# Altium PCB PCB.PcbDoc
Units mil, origin at the board's own origin, x right, y up, seen from the top; angles counter-clockwise.
Board outline 6000 x 4000 mil, 6 copper layers (Top Layer, Int1 (GND), Int2 (Sign), Int3 (Sign), Int4 (PWR), Bottom Layer), stack 61.068 mil thick; 37 components, 46 nets, 228 pads, 17 vias.
Unrouted connection lines stored in the file: 93.
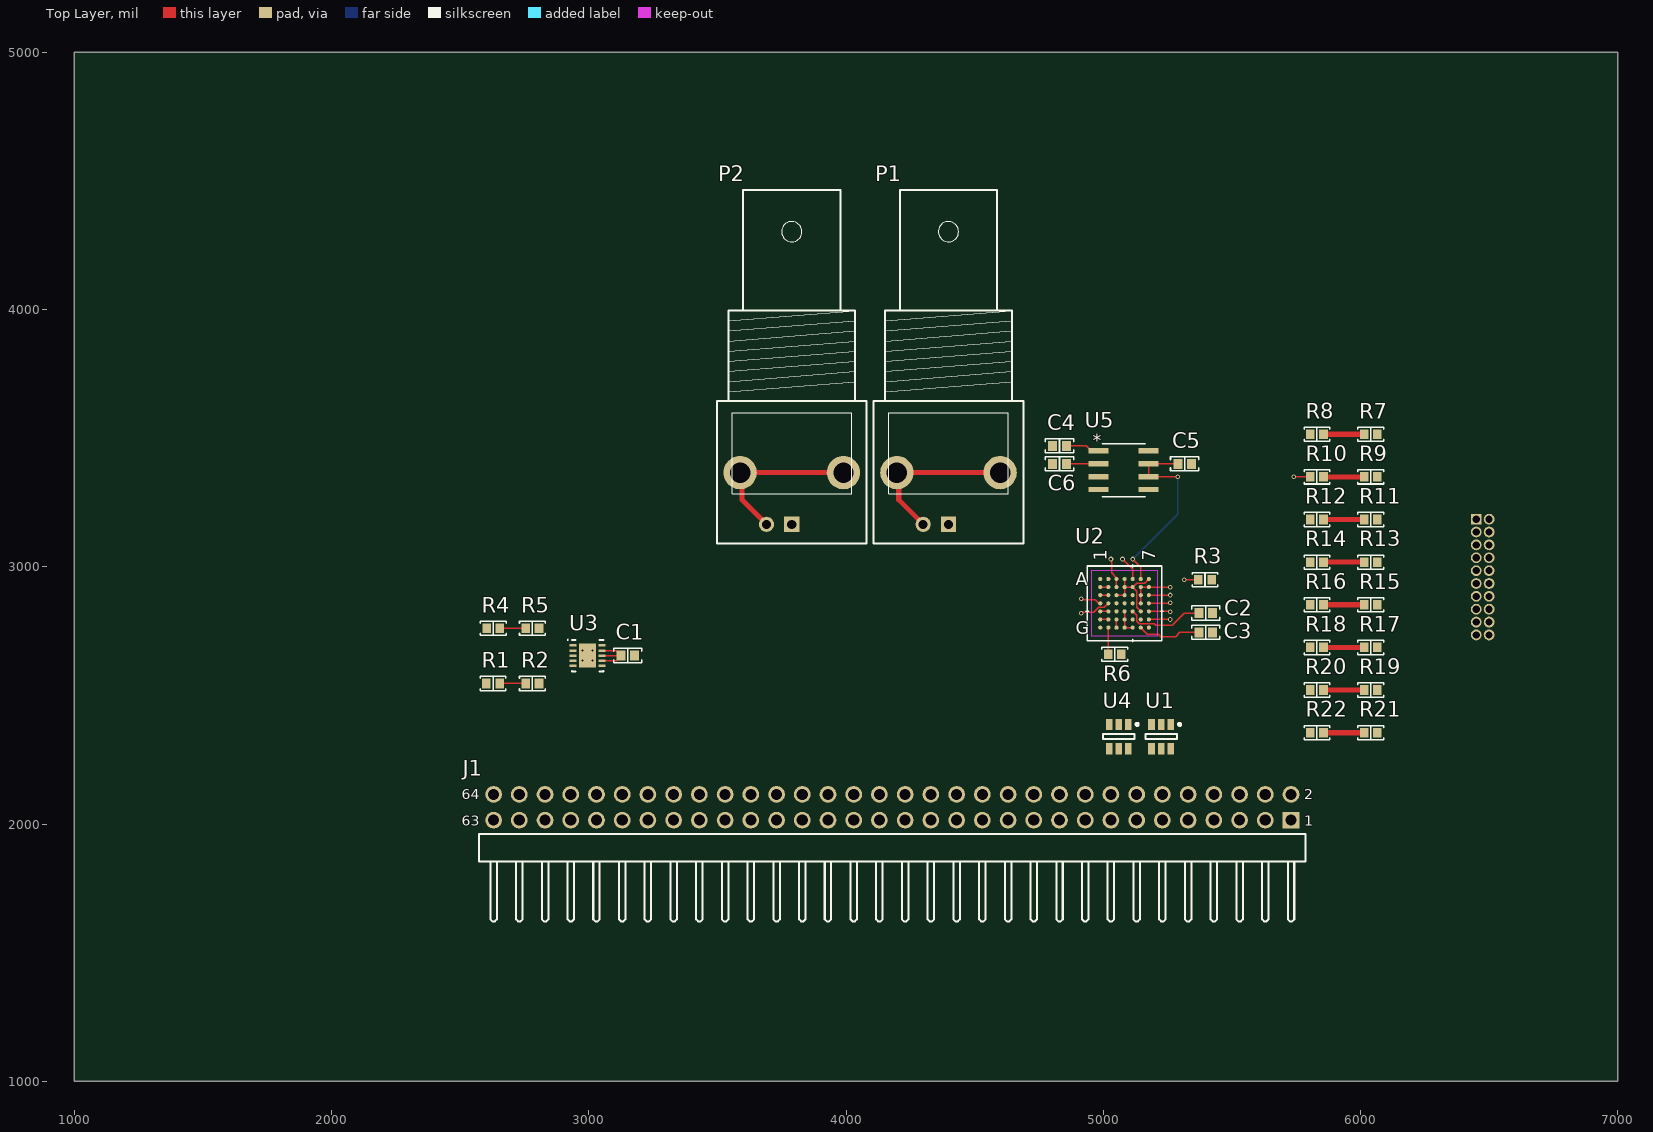
[diagram p0: Top Layer view]
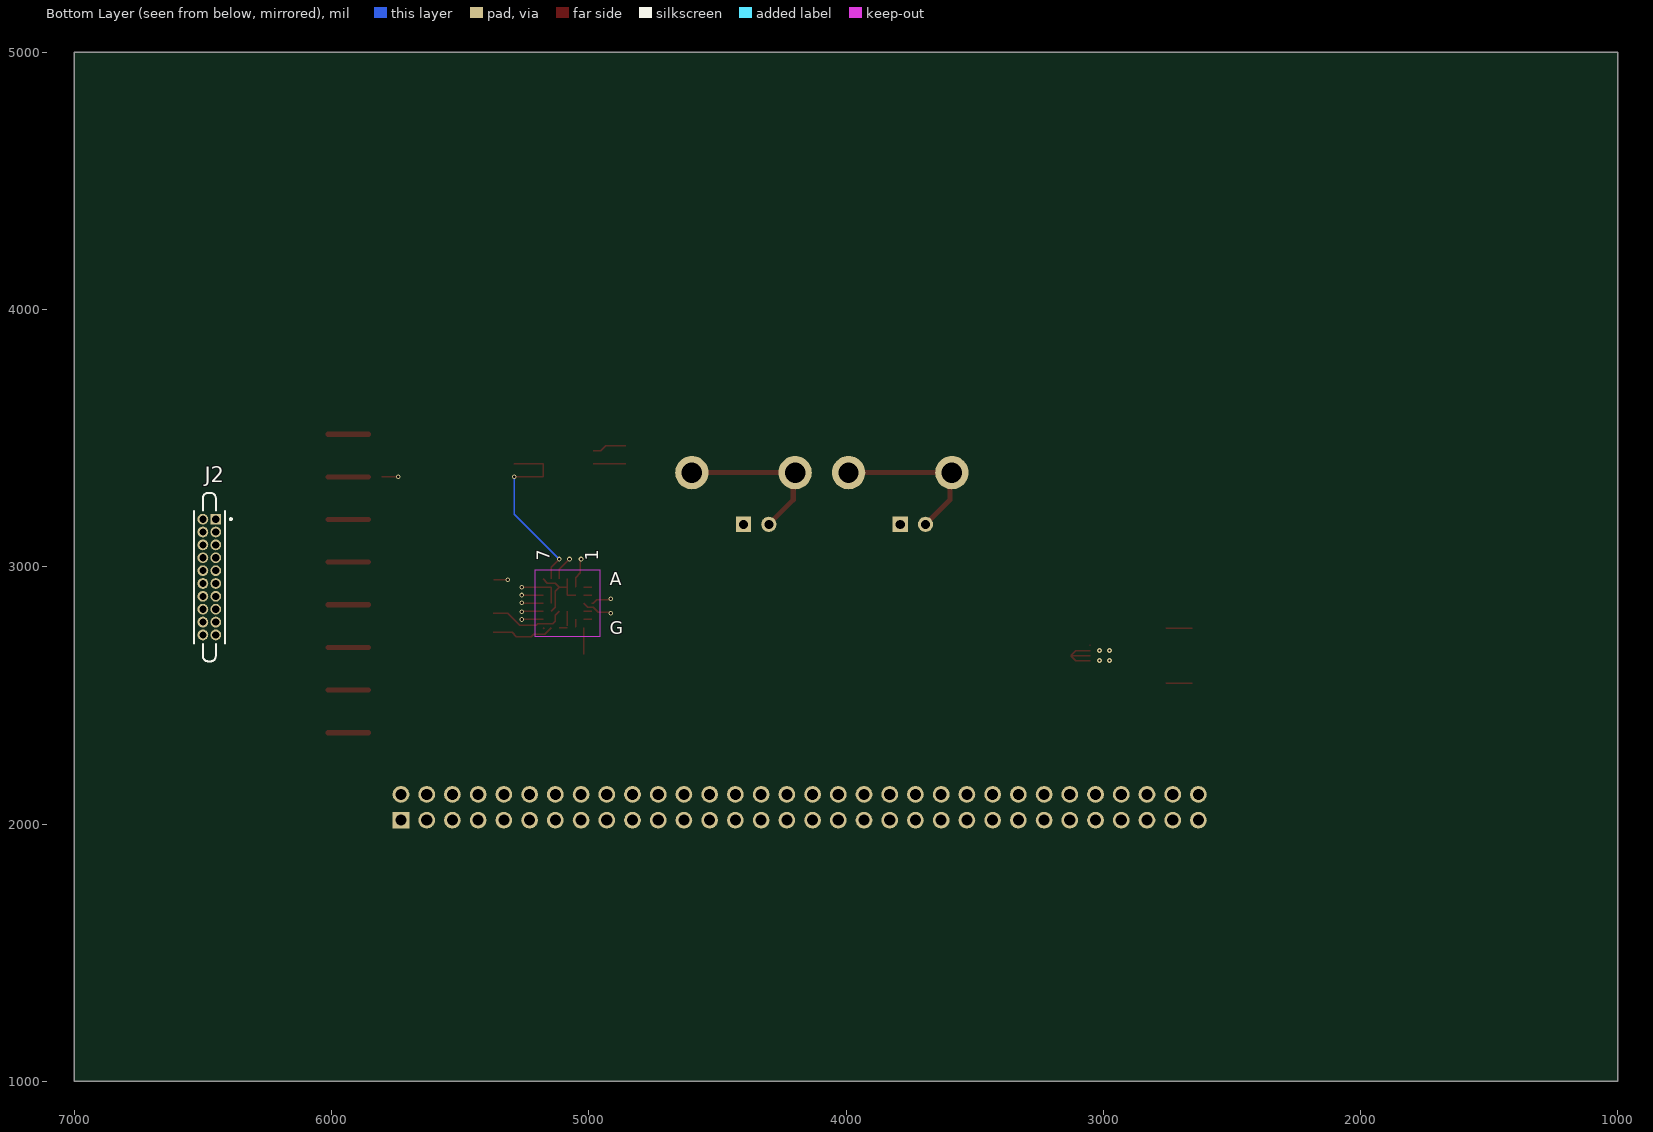
[diagram p1: Bottom Layer view, seen from below]
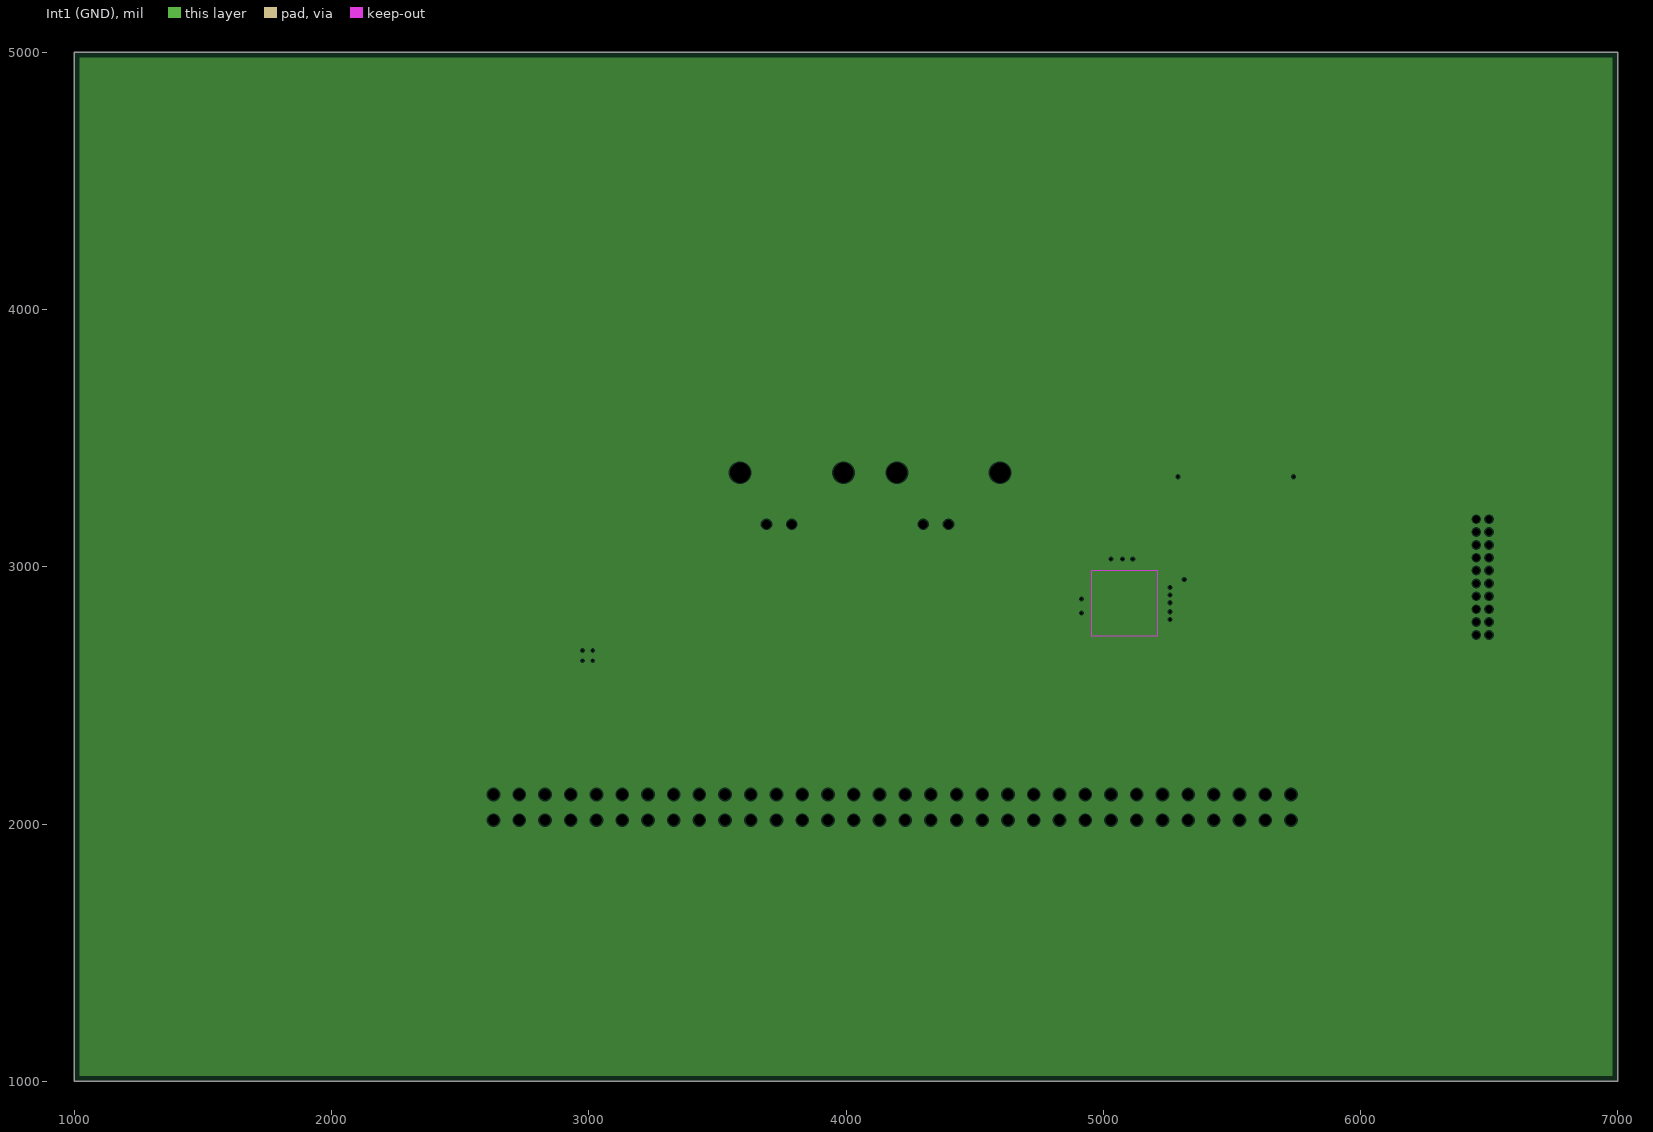
[diagram p2: Int1 (GND), clearances drawn from the general rule]
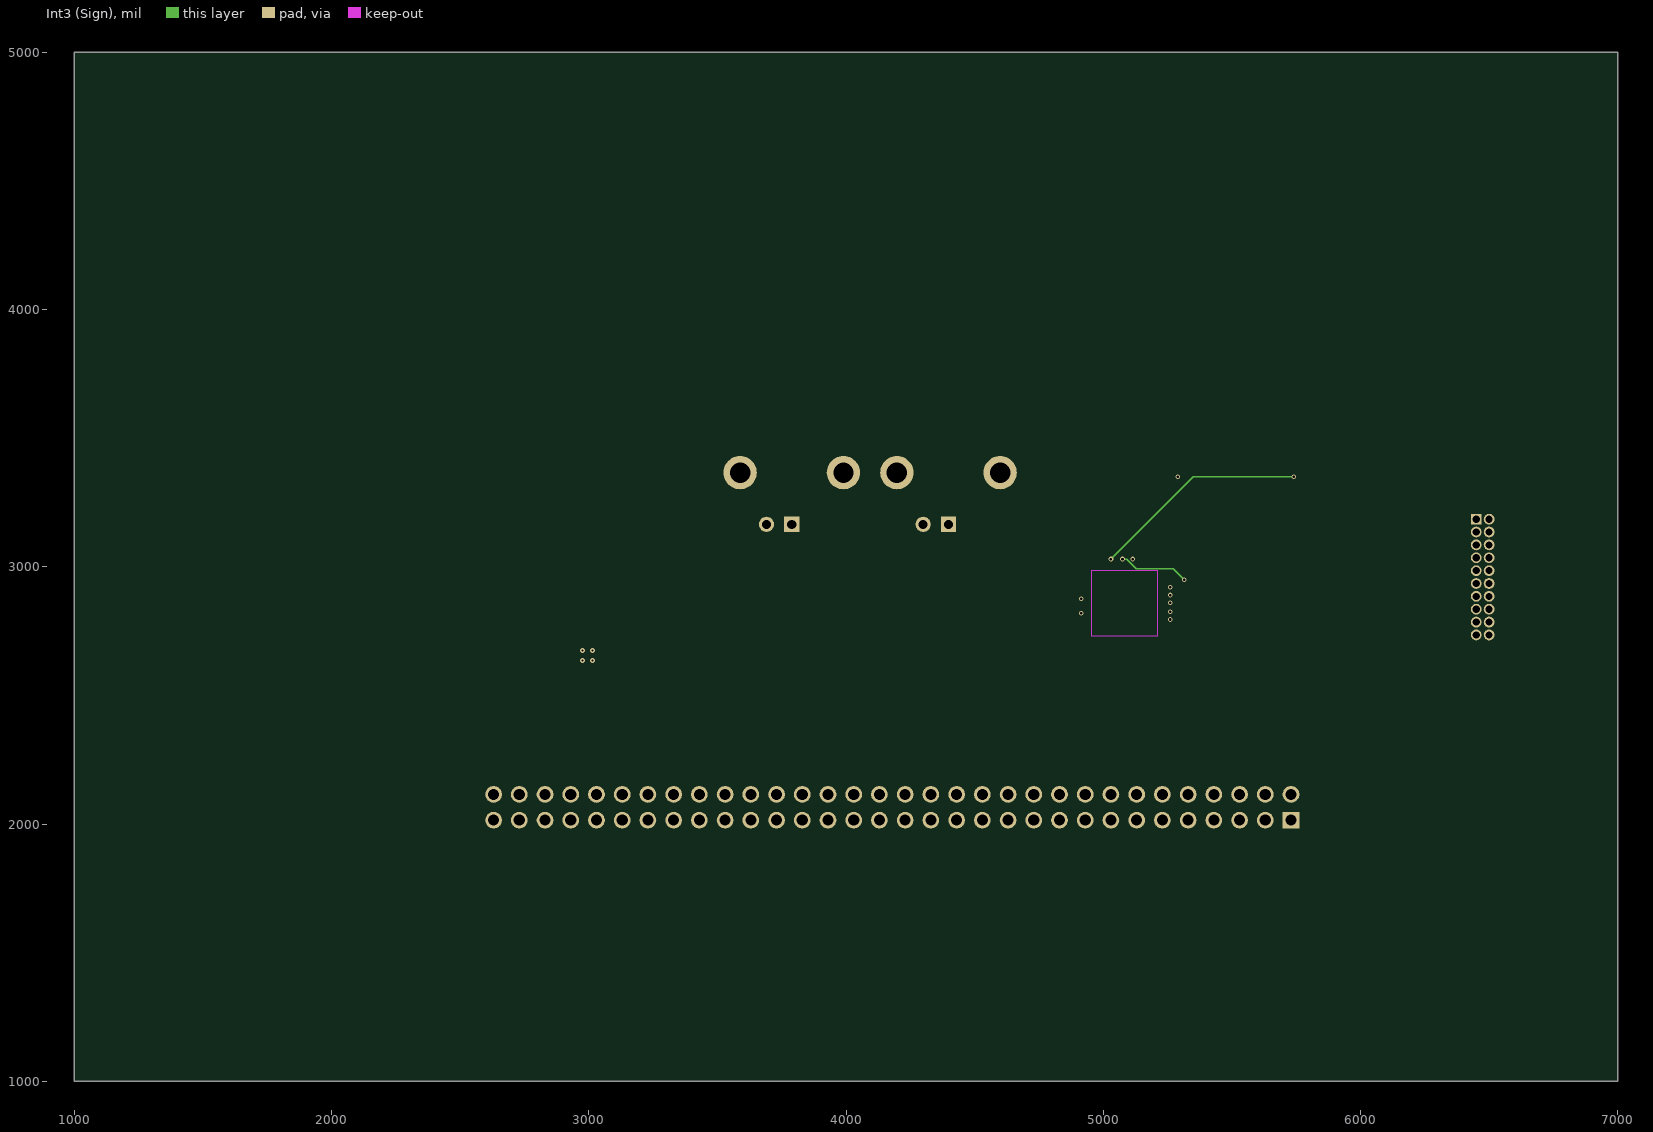
[diagram p3: Int3 (Sign)]
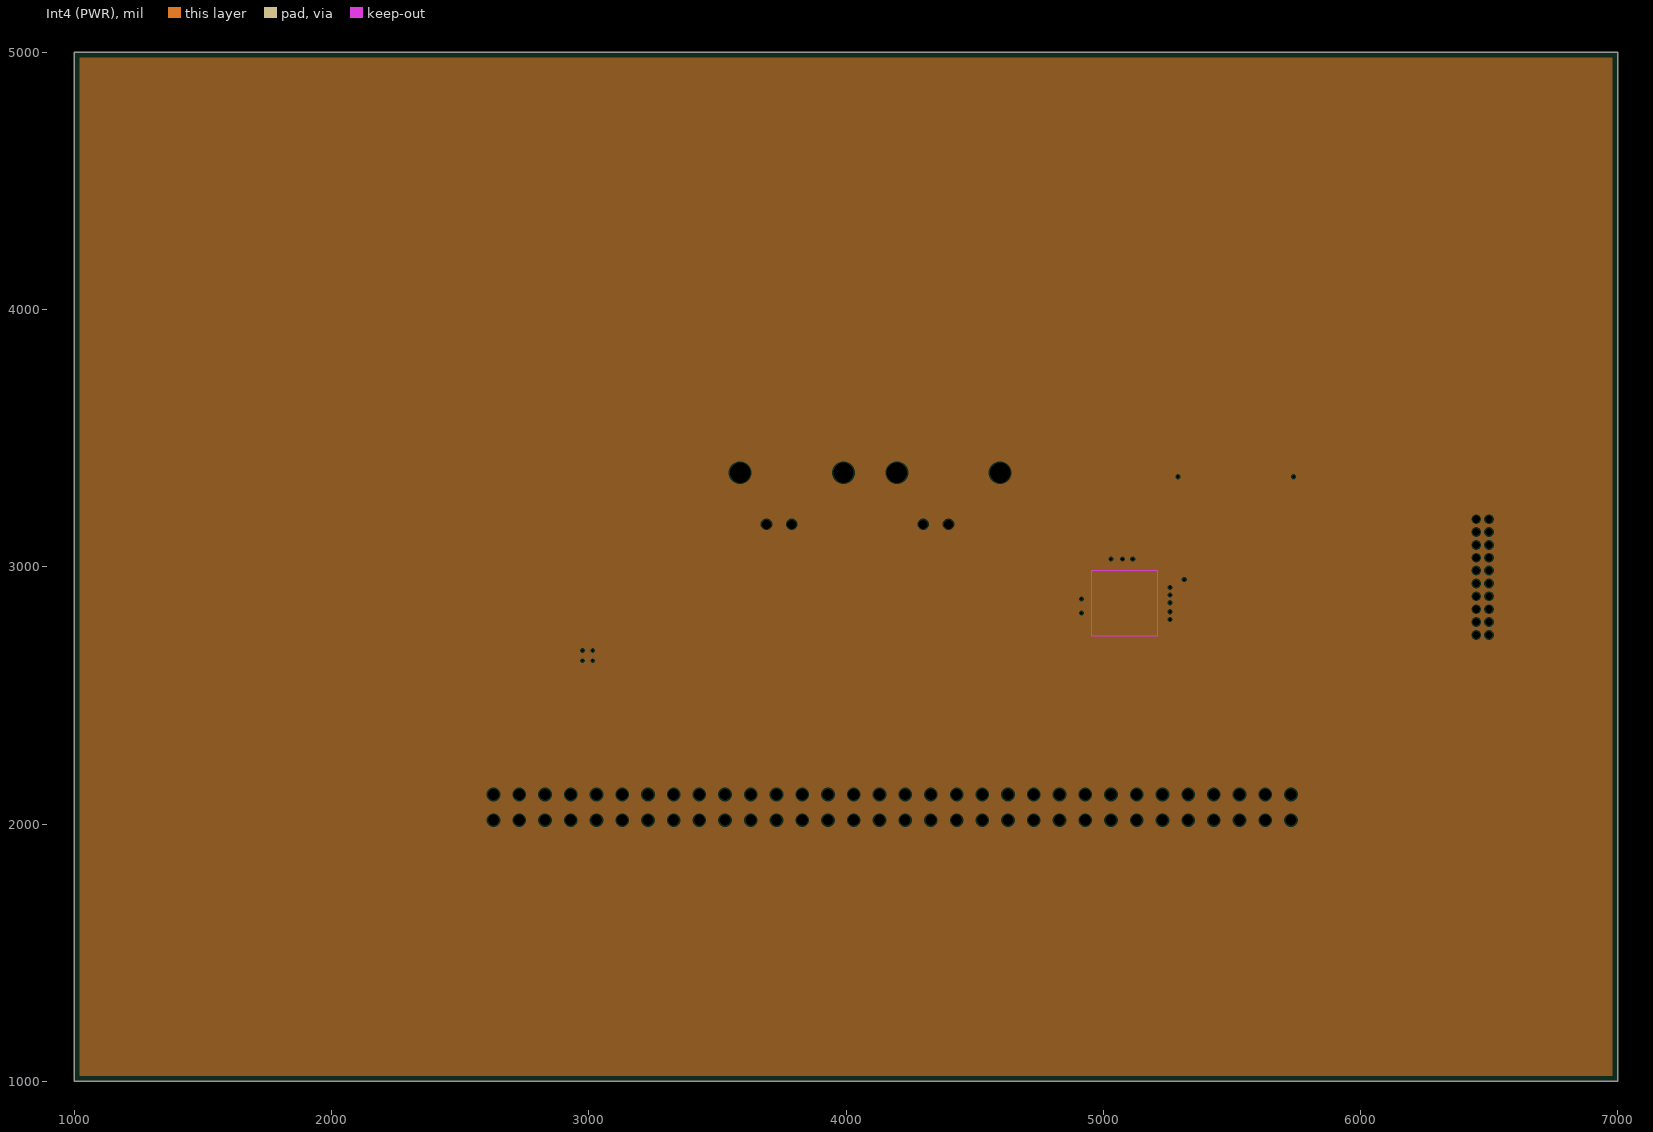
[diagram p4: Int4 (PWR), clearances drawn from the general rule]

## Layer stack, top to bottom
Top Solder: solder mask 1, SM-001, Dk 4
Top Layer: signal copper 1.378
Dielectric 1: prepreg 2.8, PP-006, Dk 4.1
Dielectric 2: prepreg 2.8, PP-006, Dk 4.1
Int1 (GND): plane copper 1.378
Dielectric 3: core 18, Core-035, Dk 4.7
Int2 (Sign): signal copper 1.378
Dielectric 4: prepreg 2.8, PP-006, Dk 4.1
Dielectric 5: prepreg 2.8, PP-006, Dk 4.1
Int3 (Sign): signal copper 1.378
Dielectric 6: core 18, Core-035, Dk 4.7
Int4 (PWR): plane copper 1.378
Dielectric 7: prepreg 2.8, PP-006, Dk 4.1
Dielectric 8: prepreg 2.8, PP-006, Dk 4.1
Bottom Layer: signal copper 1.378
Bottom Solder: solder mask 1, SM-001, Dk 4

## Board outline
1000,1000 7000,1000 7000,5000 1000,5000

## Design rules (kind name [scope] priority, off if disabled: settings)
Clearance Clearance_BGA [WithinRoom('BGA_Fanout')] p1: gap=5 ignorepadtopadclearanceinfootprint=FALSE
Clearance [All] p2: gap=10 ignorepadtopadclearanceinfootprint=FALSE except(0: Arc-Hole Track-Hole SMDPad-Hole THPad-Hole Via-Hole Fill-Hole Poly-Hole Region-Hole Text-Hole)
PlaneClearance [All] p1: clearance=5
PlaneConnect [All] p1: planeconnectstyle=Relief reliefexpansion=20 reliefentries=4 reliefconductorwidth=10 reliefairgap=10
PolygonConnect [All] p1: connectstyle=Relief reliefconductorwidth=10 reliefentries=4 polygonreliefangle="90 Angle" airgapwidth=10
RoomDefinition BGA_Fanout [InComponentClass('Room Definition1')] p1: confinementstyle=ConfineIn formatcopy=TRUE lockcomponents=FALSE outline 4871.67,2692.99 4871.67,3069.31 5247.99,3069.31 5247.99,2692.99
RoutingVias [All] p1: holewidth=10 width=18 viastyle="Through Hole" minholewidth=10 minwidth=16 maxholewidth=10 maxwidth=18
SolderMaskExpansion [All] p1: expansion=2 istentingtop=FALSE
Width Width_BGA_Fanout [WithinRoom('BGA_Fanout')] p1: maxlimit=5 minlimit=3 preferedwidth=4
Width [All] p2: maxlimit=20 minlimit=5 preferedwidth=5
28 further rules are at their usual default settings.

## Classes and differential pairs
component class "Room Definition1": U2

## Components (designator, comment, footprint, x,y, rotation, side; value= is the part's Value field where it differs from the comment)
C1 "100 pF" "CAP 0603_1608" 3151.57,2655 r0 top
C2 "0.1 µF" "CAP 0603_1608" 5398.43,2820 r180 top
C3 "0.1 µF" "CAP 0603_1608" 5398.43,2745 r180 top
C4 "0.1 µF" "CAP 0603_1608" 4830,3470 r0 top
C5 "10 µF" "CAP 0603_1608" 5316.57,3400 r180 top
C6 "10 µF" "CAP 0603_1608" 4830,3400 r0 top
J1 "61306421021" 61306421021 4180,1907.52 r0 top
J2 "SFC-110-T1-F-D" SAMTEC_SFC-110-T1-F-D 6475,2960 r90 bottom
P1 "BNC" "BNC_RA CON" 4398.5,3165 r270 top
P2 "BNC" "BNC_RA CON" 3789.21,3165 r270 top
R1 "698 kOhms" "RES 0603_1608" 2627.8,2546.32 r0 top
R2 "200 kOhms" "RES 0603_1608" 2780.75,2546.32 r0 top
R3 "0 Ohms" "RES 0603_1608" 5395.59,2950 r0 top
R4 "95.3 kOhms" "RES 0603_1608" 2628.39,2761.32 r0 top
R5 "200 kOhms" "RES 0603_1608" 2780.75,2761.32 r0 top
R6 "0 Ohms" "RES 0603_1608" 5045,2660 r180 top
R7 "0 Ohms" "RES 0603_1608" 6040,3515 r180 top
R8 "0 Ohms" "RES 0603_1608" 5830.59,3515 r180 top
R9 "0 Ohms" "RES 0603_1608" 6040,3349.29 r180 top
R10 "0 Ohms" "RES 0603_1608" 5830.59,3349.29 r180 top
R11 "0 Ohms" "RES 0603_1608" 6040,3183.57 r180 top
R12 "0 Ohms" "RES 0603_1608" 5830.59,3183.57 r180 top
R13 "0 Ohms" "RES 0603_1608" 6040,3017.86 r180 top
R14 "0 Ohms" "RES 0603_1608" 5830.59,3017.86 r180 top
R15 "0 Ohms" "RES 0603_1608" 6040,2852.14 r180 top
R16 "0 Ohms" "RES 0603_1608" 5830.59,2852.14 r180 top
R17 "0 Ohms" "RES 0603_1608" 6040,2686.43 r180 top
R18 "0 Ohms" "RES 0603_1608" 5830.59,2686.43 r180 top
R19 "0 Ohms" "RES 0603_1608" 6040,2520.71 r180 top
R20 "0 Ohms" "RES 0603_1608" 5830.59,2520.71 r180 top
R21 "0 Ohms" "RES 0603_1608" 6040,2355 r180 top
R22 "0 Ohms" "RES 0603_1608" 5830.59,2355 r180 top
U1 "DAC121S101CIMK/NOPB" MK06A_N 5225,2340 r270 top
U2 "ADAQ4001BBCZ" BGA49_ADAQ4001BBCZ_ADI 5082.99,2857.99 r0 top
U3 "LT3023EDD#PBF" LT-DD-10_V 2995.32,2654.68 r0 top
U4 "DAC121S101CIMK/NOPB" MK06A_N 5060,2340 r270 top
U5 "MAX6126AASA50+" 21-0041B_8 5079.22,3375.39 r0 top

## Footprints (in the part's own frame and the unit in brackets; to place one, negate y for a bottom-side part, rotate by r counter-clockwise, add the part's x,y. Pads: shape width x height; smd on the part's side, far side on the other; paste and mask are expansions set on the pad)
21-0041B_8 [mil]
  rect 78x21 smd paste+0 mask+0: 1(-97,75) 2(-97,25) 3(-97,-25) 4(-97,-75) 5(97,-75) 6(97,-25) 7(97,25) 8(97,75)
  silkscreen extent -84,-104 84,104, body extent -122,-99 122,99, height 69
61306421021 [mm] "Pin Header, pitch 2.54 mm, THT, Angled, dual row, 64p"
  rect 1.65x1.65 hole 1.1: 1(39.37,2.73)
  round 1.65 hole 1.1: 2(39.37,5.27) 3(36.83,2.73) 4(36.83,5.27) 5(34.29,2.73) 6(34.29,5.27) 7(31.75,2.73) 8(31.75,5.27) 9(29.21,2.73) 10(29.21,5.27) 11(26.67,2.73) 12(26.67,5.27) 13(24.13,2.73) 14(24.13,5.27) 15(21.59,2.73) 16(21.59,5.27) 17(19.05,2.73) 18(19.05,5.27) 19(16.51,2.73) 20(16.51,5.27) 21(13.97,2.73) 22(13.97,5.27) 23(11.43,2.73) 24(11.43,5.27) 25(8.89,2.73) 26(8.89,5.27) 27(6.35,2.73) 28(6.35,5.27) 29(3.81,2.73) 30(3.81,5.27) 31(1.27,2.73) 32(1.27,5.27) 33(-1.27,2.73) 34(-1.27,5.27) 35(-3.81,2.73) 36(-3.81,5.27) 37(-6.35,2.73) 38(-6.35,5.27) 39(-8.89,2.73) 40(-8.89,5.27) 41(-11.43,2.73) 42(-11.43,5.27) 43(-13.97,2.73) 44(-13.97,5.27) 45(-16.51,2.73) 46(-16.51,5.27) 47(-19.05,2.73) 48(-19.05,5.27) 49(-21.59,2.73) 50(-21.59,5.27) 51(-24.13,2.73) 52(-24.13,5.27) 53(-26.67,2.73) 54(-26.67,5.27) 55(-29.21,2.73) 56(-29.21,5.27) 57(-31.75,2.73) 58(-31.75,5.27) 59(-34.29,2.73) 60(-34.29,5.27) 61(-36.83,2.73) 62(-36.83,5.27) 63(-39.37,2.73) 64(-39.37,5.27)
  silkscreen extent -40.79,-7.27 40.79,1.35, body extent -40.64,-7.27 40.64,5.63, height 5.12
BGA49_ADAQ4001BBCZ_ADI [mil]
  round 16 smd paste+0 mask+0: A1(-94.49,94.49) A2(-62.99,94.49) A3(-31.5,94.49) A4(0,94.49) A5(31.5,94.49) A6(62.99,94.49) A7(94.49,94.49) B1(-94.49,62.99) B2(-62.99,62.99) B3(-31.5,62.99) B4(0,62.99) B5(31.5,62.99) B6(62.99,62.99) B7(94.49,62.99) C1(-94.49,31.5) C2(-62.99,31.5) C3(-31.5,31.5) C4(0,31.5) C5(31.5,31.5) C6(62.99,31.5) C7(94.49,31.5) D1(-94.49,0) D2(-62.99,0) D3(-31.5,0) D4(0,0) D5(31.5,0) D6(62.99,0) D7(94.49,0) E1(-94.49,-31.5) E2(-62.99,-31.5) E3(-31.5,-31.5) E4(0,-31.5) E5(31.5,-31.5) E6(62.99,-31.5) E7(94.49,-31.5) F1(-94.49,-62.99) F2(-62.99,-62.99) F3(-31.5,-62.99) F4(0,-62.99) F5(31.5,-62.99) F6(62.99,-62.99) F7(94.49,-62.99) G1(-94.49,-94.49) G2(-62.99,-94.49) G3(-31.5,-94.49) G4(0,-94.49) G5(31.5,-94.49) G6(62.99,-94.49) G7(94.49,-94.49)
  Keep-Out Layer region: -127.74,-127.74 -127.74,127.74 127.74,127.74 127.74,-127.74
  silkscreen extent -150,-150 150,150, body extent -140,-140 140,140, height 96
"BNC_RA CON" [mm] "Connector; BNC Elbow"
  rect 1.5x1.5 hole 0.9: 1(0,0)
  round 3.3 hole 2: 2(-5.1,5.1) 2(-5.1,-5.1)
  round 1.5 hole 0.9: 2(0,-2.5)
  silkscreen extent -33,-7.4 1.9,7.4
"CAP 0603_1608" [mm] "Chip Capacitor, 2-Leads, Body 1.60x0.80mm, IPC Medium Density"
  rect 0.9x1 smd: 1(-0.675,0) 2(0.675,0)
  silkscreen extent -1.4,-0.7 1.4,0.7, body extent -0.8,-0.41 0.8,0.41, height 0.82
LT-DD-10_V [mm] "SON, 10-Leads, Body 3x3mm, Pitch 0.5mm, Thermal Pad 2.38x1.65mm"
  rect 0.7x0.25 smd mask+0.102: 1(-1.425,1) 2(-1.425,0.5) 3(-1.425,0) 4(-1.425,-0.5) 5(-1.425,-1) 6(1.425,-1) 7(1.425,-0.5) 8(1.425,0) 9(1.425,0.5) 10(1.425,1)
  rect 1.65x2.38 smd mask+0.102: 11(0,0)
  silkscreen extent -2,-1.55 1.55,1.6, body extent -1.5,-1.5 1.5,1.5, height 0.8
MK06A_N [mm] "SOT23, 6-Leads, Body 3.0x1.7mm, Pitch 0.95mm, Lead Span 2.9mm, IPC Medium Density"
  rect 1.1x0.65 smd: 1(-1.2,0.95) 2(-1.2,0) 3(-1.2,-0.95) 4(1.2,-0.95) 5(1.2,0) 6(1.2,0.95)
  silkscreen extent -1.32,-1.55 0.25,1.95, body extent -0.87,-1.53 0.87,1.54, height 1
"RES 0603_1608" [mm] "Chip Resistor, 2-Leads, Body 1.60x0.80mm, IPC Medium Density"
  rect 0.85x0.95 smd: 1(-0.65,0) 2(0.65,0)
  silkscreen extent -1.27,-0.7 1.27,0.7, body extent -0.8,-0.4 0.8,0.4, height 0.45
SAMTEC_SFC-110-T1-F-D [mm]
  rect 1.06x1.06 hole 0.71: 01(5.715,-0.635)
  round 1.06 hole 0.71: 02(5.715,0.635) 03(4.445,-0.635) 04(4.445,0.635) 05(3.175,-0.635) 06(3.175,0.635) 07(1.905,-0.635) 08(1.905,0.635) 09(0.635,-0.635) 10(0.635,0.635) 11(-0.635,-0.635) 12(-0.635,0.635) 13(-1.905,-0.635) 14(-1.905,0.635) 15(-3.175,-0.635) 16(-3.175,0.635) 17(-4.445,-0.635) 18(-4.445,0.635) 19(-5.715,-0.635) 20(-5.715,0.635)
  silkscreen extent -8.32,-2.22 8.32,1.53

## Part data
C1: library part C0603C101K5GACAUTO, "CAP CER 100PF 50V C0G/NP0 0603", Device Package="0603 (1608 Metric)", manufacturer=KEMET, Operating Temperature="-55°C ~ 125°C", Ratings=AEC-Q200, Supplier Part Number 1=399-6843-1-ND, Temperature Coefficient="C0G, NP0", Tolerance=±10%, Voltage - Rated=50V, Applications=Automotive, Capacitance="100 pF", componentlink1description=Datasheet, componentlink1url=https://api.kemet.com/component-edge/download/datasheet/C0603C101K5GACAUTO.pdf, componentlink2description="DigiKey Link", componentlink2url=https://www.digikey.com/en/products/detail/kemet/C0603C101K5GACAUTO/3314842, Features="Low ESL", lastupdated="4/12/2022 10:08:31 PM", Lifecycle Status=Active, Minimum Order=1, Mounting Type="Surface Mount, MLCC", Package / Case="0603 (1608 Metric)", packaging=TapeAndReel, Part Number=C0603C101K5GACAUTO, Part Status=Active, partid=2201, price=0.02, series="SMD Auto C0G", Size / Dimension="0.063\" L x 0.031\" W (1.60mm x 0.80mm)", Supplier 1=DigiKey, Thickness (Max)="0.034\" (0.87mm)"
C2 C3 C4: library part C0603C104K5RAC7411, "CAP CER 0.1UF 50V X7R 0603", Device Package="0603 (1608 Metric)", manufacturer=KEMET, Operating Temperature="-55°C ~ 125°C", Supplier Part Number 1=399-7374-2-ND, Temperature Coefficient=X7R, Tolerance=±10%, Voltage - Rated=50V, Applications="Bypass, Decoupling", Capacitance="0.1 µF", componentlink1description=Datasheet, componentlink1url=https://api.kemet.com/component-edge/download/datasheet/C0603C104K5RAC7411.pdf, componentlink2description="DigiKey Link", componentlink2url=https://www.digikey.com/en/products/detail/kemet/C0603C104K5RAC7411/3317013, lastupdated="4/12/2022 10:08:31 PM", Lifecycle Status=Active, Minimum Order=15000, Mounting Type="Surface Mount, MLCC", Package / Case="0603 (1608 Metric)", packaging=TapeAndReel, Part Number=C0603C104K5RAC7411, Part Status=Active, partid=2233, price=0.01, series="SMD Comm X7R", Size / Dimension="0.063\" L x 0.031\" W (1.60mm x 0.80mm)", Supplier 1=DigiKey, Thickness (Max)="0.035\" (0.90mm)"
C5 C6: library part GRM188R60J106ME47D, "CAP CER 10UF 6.3V X5R 0603", Device Package="0603 (1608 Metric)", manufacturer="Murata Electronics", Operating Temperature="-55°C ~ 85°C", Supplier Part Number 1=490-3896-1-ND, Temperature Coefficient=X5R, Tolerance=±20%, Voltage - Rated=6.3V, Applications="General Purpose", Capacitance="10 µF", componentlink1description=Datasheet, componentlink1url=https://www.murata.com/~/media/webrenewal/support/library/catalog/products/capacitor/mlcc/c02e.ashx?la=en-us, componentlink2description="DigiKey Link", componentlink2url=https://www.digikey.com/en/products/detail/murata-electronics/GRM188R60J106ME47D/965910, lastupdated="4/12/2022 10:08:30 PM", Lifecycle Status=Active, Minimum Order=1, Mounting Type="Surface Mount, MLCC", Package / Case="0603 (1608 Metric)", packaging=TapeAndReel, Part Number=GRM188R60J106ME47D, Part Status=Active, partid=2351, price=0.03, series=GRM, Size / Dimension="0.063\" L x 0.031\" W (1.60mm x 0.80mm)", Supplier 1=DigiKey, Thickness (Max)="0.035\" (0.90mm)"
J1: library part CMP-1502-01137-1, "THT Angled Pin Header WR-PHD, Pitch 2.54 mm, Dual Row, 64 pins", Contact Resistance=20mOhm, manufacturer="Wurth Elektronik", Operating Temperature=-40to105degC, Rated Current=3A, Withstanding Voltage=500VAC, Working Voltage=250VAC, Datasheet URL=https://katalog.we-online.de/em/datasheet/6130xx21021.pdf, Gender=Male, Manufacturer URL=http://www.we-online.de, Mounting Technology=THT, Orientation=Angled, Package Reference=61306421021, packaging=Bag, Part Number=61306421021, Pin Number=64, Pitch=2.54mm, Publisher=WurthElektronik, Row Number=Dual
J2: Package=None, Availability=Unavailable, MP=SFC-110-T1-F-D, price=None
P1 P2: "BNC Elbow Connector", LatestRevisionDate=17-Jul-2002, LatestRevisionNote="Re-released for DXP Platform.", Publisher="Altium Limited"
R1: library part RC0603FR-07698KL, "RES 698K OHM 1% 1/10W 0603", Device Package="0603 (1608 Metric)", manufacturer=Yageo, Operating Temperature="-55°C ~ 155°C", Power (Watts)="0.1W, 1/10W", Supplier Device Package=0603, Supplier Part Number 1=311-698KHRCT-ND, Temperature Coefficient=±100ppm/°C, Tolerance=±1%, componentlink1description=Datasheet, componentlink1url=https://www.yageo.com/upload/media/product/productsearch/datasheet/rchip/PYu-RC_Group_51_RoHS_L_10.pdf, componentlink2description="DigiKey Link", componentlink2url=https://www.digikey.com/en/products/detail/yageo/RC0603FR-07698KL/727362, Composition="Thick Film", Features="Moisture Resistant", Height - Seated (Max)="0.022\" (0.55mm)", lastupdated="4/12/2022 10:26:44 PM", Lifecycle Status=Active, Minimum Order=1, Number of Terminations=2, Package / Case="0603 (1608 Metric)", packaging=CutTape, Part Number=RC0603FR-07698KL, Part Status=Active, partid=22804, price=0.01, Resistance="698 kOhms", series=RC_L, Size / Dimension="0.063\" L x 0.031\" W (1.60mm x 0.80mm)", Supplier 1=DigiKey
R2 R5: library part RK73B1JTTD204J, "RES 200K OHM 5% 1/10W 0603", Device Package="0603 (1608 Metric)", manufacturer="KOA Speer Electronics, Inc.", Operating Temperature="-55°C ~ 155°C", Power (Watts)="0.1W, 1/10W", Ratings=AEC-Q200, Supplier Device Package=0603, Supplier Part Number 1=2019-RK73B1JTTD204JCT-ND, Temperature Coefficient=±200ppm/°C, Tolerance=±5%, componentlink1description=Datasheet, componentlink1url=http://www.koaspeer.com/catimages/Products/RK73B/RK73B.pdf, componentlink2description="DigiKey Link", componentlink2url=https://www.digikey.com/en/products/detail/koa-speer-electronics-inc/RK73B1JTTD204J/9844774, Composition="Thick Film", Features="Automotive AEC-Q200", Height - Seated (Max)="0.022\" (0.55mm)", lastupdated="4/12/2022 10:27:51 PM", Lifecycle Status=Active, Minimum Order=1, Number of Terminations=2, Package / Case="0603 (1608 Metric)", packaging=CutTape, Part Number=RK73B1JTTD204J, Part Status=Active, partid=6049, price=0.01, Resistance="200 kOhms", series=RK73B, Size / Dimension="0.063\" L x 0.031\" W (1.60mm x 0.80mm)", Supplier 1=DigiKey
R3 R6 R7 R8 R9 R10 R11 R12 R13 R14 R15 R16 R17 R18 R19 R20 R21 R22: library part AC0603JR-070RL, "RES SMD 0 OHM JUMPER 1/10W 0603", Device Package="0603 (1608 Metric)", manufacturer=Yageo, Operating Temperature="-55°C ~ 155°C", Power (Watts)="0.1W, 1/10W", Ratings=AEC-Q200, Supplier Device Package=0603, Supplier Part Number 1=311-0.0LECT-ND, Tolerance=Jumper, componentlink1description=Datasheet, componentlink1url=https://www.yageo.com/upload/media/product/productsearch/datasheet/rchip/PYu-AC_51_RoHS_L_7.pdf, componentlink2description="DigiKey Link", componentlink2url=https://www.digikey.com/en/products/detail/yageo/AC0603JR-070RL/2827828, Composition="Thick Film", Features="Automotive AEC-Q200, Moisture Resistant", Height - Seated (Max)="0.022\" (0.55mm)", lastupdated="4/12/2022 10:26:34 PM", Lifecycle Status=Active, Minimum Order=1, Number of Terminations=2, Package / Case="0603 (1608 Metric)", packaging=CutTape, Part Number=AC0603JR-070RL, Part Status=Active, partid=23964, price=0.01, Resistance="0 Ohms", series=AC, Size / Dimension="0.063\" L x 0.031\" W (1.60mm x 0.80mm)", Supplier 1=DigiKey
R4: library part RC0603FR-0795K3L, "RES 95.3K OHM 1% 1/10W 0603", Device Package="0603 (1608 Metric)", manufacturer=Yageo, Operating Temperature="-55°C ~ 155°C", Power (Watts)="0.1W, 1/10W", Supplier Device Package=0603, Supplier Part Number 1=311-95.3KHRCT-ND, Temperature Coefficient=±100ppm/°C, Tolerance=±1%, componentlink1description=Datasheet, componentlink1url=https://www.yageo.com/upload/media/product/productsearch/datasheet/rchip/PYu-RC_Group_51_RoHS_L_10.pdf, componentlink2description="DigiKey Link", componentlink2url=https://www.digikey.com/en/products/detail/yageo/RC0603FR-0795K3L/727436, Composition="Thick Film", Features="Moisture Resistant", Height - Seated (Max)="0.022\" (0.55mm)", lastupdated="4/12/2022 10:27:26 PM", Lifecycle Status=Active, Minimum Order=1, Number of Terminations=2, Package / Case="0603 (1608 Metric)", packaging=CutTape, Part Number=RC0603FR-0795K3L, Part Status=Active, partid=12452, price=0.01, Resistance="95.3 kOhms", series=RC_L, Size / Dimension="0.063\" L x 0.031\" W (1.60mm x 0.80mm)", Supplier 1=DigiKey
U1 U4: library part CMP-0061-00064-2, "12-Bit Micro Power, RRO Digital-to-Analog Converter, 6-pin Tiny SOT23, Pb-Free", manufacturer="National Semiconductor", PackageTopMarking=X61C*XTT, PowerWise=Y, Code_IPC=SOT26A-6, Code_JEDEC=MO-193-AA, componentlink1description="DAC121S101 Datasheet", componentlink1url=http://www.national.com/ds/DA/DAC121S101.pdf, componentlink2description="DAC121S101 Web Page", componentlink2url=http://www.national.com/pf/DA/DAC121S101.html, ComponentLink3Description="MK06A Package Page", ComponentLink3URL=http://www.national.com/packaging/folders/mk06a.html, CompType="D/A Converter", DatasheetVersion=Feb-2010, PackageDescription="Molded TSOT, 2.97 x 1.65 x 0.87mm Body, 6 Lead, 0.95mm Pitch", PackageReference=MK06A, PackageVersion="revE, Nov-2008", PinCount=6, RevisionNote="Component URLs added", RoHS=Y
U2: "Analog Devices ADAQ4001 - 16-Bit Sequential Approximation ADC", Mfr_Name="Analog Devices Inc", Supplier Part Number 1=584-ADAQ4001BBCZ, Copyright="Copyright (C) 2022 Ultra Librarian. All rights reserved.", Manufacturer_Part_Number=ADAQ4001BBCZ, RefDes=RefDes, Supplier 1=Mouser, Supplier 2="Arrow Electronics", Supplier Part Number 2=ADAQ4001BBCZ, Type=DEV
U3: library part CMP-0476-00173-1, "Dual 100 mA, Low Dropout, Low Noise, Micropower Regulator, 1.8 to 20 V Vin, Adjustable Vout, 10-pin SON (DD-10), -40 to 125 degC, Pb-Free", Dropout Voltage(V)=0.3, manufacturer="Linear Technology", Output Voltage=Adj, Shutdown Current(uA)=0.1, Code_JEDEC=MO-229, componentlink1description="Manufacturer URL", componentlink1url=http://www.linear.com/, componentlink2description=Datasheet, componentlink2url=http://cds.linear.com/docs/en/datasheet/3023fa.pdf, ComponentLink3Description="Package Specification", ComponentLink3URL=http://cds.linear.com/docs/en/packaging/DFN_10_05-08-1699.pdf, DatasheetVersion="Rev. A", Discrete Pass Element=no, Iout(mA)=100, Isupply(mA)=0.02, Mounting Technology="Surface Mount", Noise(uV)=20, Number of Outputs=2, PackageDescription="10-Pin Plastic DFN, Body 3 x 3 mm, Pitch 0.5 mm", PackageReference=DD-10, PackageVersion="Rev. C, 06/2010", PartNumber=LT3023EDD#PBF, PSRR(dB)=65, RoHS=TRUE, Vin Max(V)=20, Vin Min(V)=1.8, Vout Max(V)=20, Vout Min(V)=1.22
U5: "MAX6126AASA50+ Voltage Reference", Mfr_Name="Maxim Integrated Products", Copyright="Copyright (C) 2022 Ultra Librarian. All rights reserved.", Manufacturer_Part_Number=MAX6126AASA50+, RefDes=RefDes, Type=DEV

## Via types
v1: diameter 18, hole 10, Top Layer to Bottom Layer, 13 vias
v2: diameter 19.68, hole 7.87, Top Layer to Bottom Layer, 4 vias

## Nets (pads, with @x,y where several pads share a name; then routed paths per layer and width w, separated by ;. In a path a pad name is that pad's centre, name@x,y a point inside that pad or via, vN(x,y) a via of type N, cw(c..) or ccw(c..) an arc to the next point about the centre after c; other vN are vias at no path point)
`: J2.07 U1.1
ADC_CS: J1.26 U2.F7 | length 82.5
  Top Layer w5: U2.F7 v1(5260,2795)
ADC_IN+: C2.2 U2.E5 | length 311.4
  Top Layer w5: U2.E5 5129.99,2811 5129.99,2789.08 5140.06,2779 5197.72,2779 5203.23,2773.5 5268.91,2773.5 5315.41,2820 C2.2
ADC_IN-: C3.2 U2.G6 | length 247.2
  Top Layer w5: U2.G6 5171.73,2737.76 5213.83,2737.76 5223.09,2728.5 5281.61,2728.5 5298.11,2745 C3.2
ADC_MISO: J1.20 U2.E7 | length 83.1
  Top Layer w5: U2.E7 5258.5,2826.5 v1(5260,2825)
ADC_MOSI: J1.14 U2.C7 | length 82.7
  Top Layer w5: U2.C7 5259.49,2889.49 v1(5260,2890)
ADC_SCLK: J1.8 U2.D7 | length 83.4
  Top Layer w5: U2.D7 5257.99,2857.99 v1(5260,2860)
ADC_VCMO: R6.2 U2.G2 | length 103.7
  Top Layer w5: R6.2 5020,2660.59 U2.G2
AGND: C2.1 C3.1 C4.1 C5.1 C6.1 J2.03 J2.04 J2.05 J2.06 J2.09 J2.10 J2.11 J2.12 P1.2 P2.2 R3.2 R6.1 U1.2 U2.A1 U2.A4 U2.A7 U2.B4 U2.B5 U2.C3 U2.C4 U2.E6 U2.G1 U2.G7 U4.2 U5.3 U5.4 | length 1604.2
  Top Layer w5: U2.C3 U2.C4 U2.B4 ; U2.A4 U2.B4 ; U2.E6 5130.24,2842.24 5130.24,2905.24 U2.B5 ; U2.G7@5173.89,2759.91 U2.G7 ; U2.A7 5161.73,2936.73 5130.24,2936.73 U2.B5 ; U2.B4 U2.B5
  Top Layer w20: P2.2@3690.79,3165 3595.53,3260.26 3595.53,3358.68 3588.43,3365.79 P2.2@3990,3365.79 ; P1.2@4300.08,3165 4204.82,3260.26 4204.82,3358.68 4197.72,3365.79 P1.2@4599.29,3365.79
C1_N: J2.13 P1.1 R7.1 R9.1 R11.1 R13.1
C1_P: J2.14 P2.1 R15.1 R17.1 R19.1 R21.1
DAC1_CS: J1.38 U1.6
DAC1_MOSI: J1.44 U1.4
DAC1_SCLK: J1.32 U1.5
DAC2_CS: J1.56 U4.6
DAC2_MOSI: J1.62 U4.4
DAC2_OUT: J2.08 U4.1
DAC2_SCLK: J1.50 U4.5
DGND: J1.4 J1.5 J1.10 J1.11 J1.16 J1.17 J1.22 J1.23 J1.28 J1.29 J1.34 J1.35 J1.40 J1.41 J1.46 J1.47 J1.52 J1.53 J1.58 J1.59 J1.64
FPGA_3V3: J1.2 J1.61 J1.63 U2.B6 U2.B7 U2.C6 U2.D6 U2.E3 | length 177.4
  Top Layer w5: U2.D6 U2.C6 U2.B6 U2.B7 5259.02,2920.98 v1(5260,2920)
GND: C1.2 R2.2 R5.2 U3.3 U3.11
  other v2: 2975.63,2635 3015,2635 2975.63,2674.37 3015,2674.37
IN+: R16.2 U2.D2 | length 120.7
  Top Layer w5: v1(4915,2820) 4917.49,2822.49 4962.57,2822.49 4982.08,2842 5004,2842 U2.D2
IN-: R8.2 U2.D1 | length 80.5
  Top Layer w5: v1(4915,2875) 4917.49,2872.51 4968.9,2872.51 4983.42,2857.99 U2.D1
N15V: J2.16
NetC4_2: C4.2 U5.1 | length 133.8
  Top Layer w5: C4.2 4934.12,3470 4953.72,3450.39 U5.1
NetR1_2: R1.2 R2.1 U3.4 | length 103.7
  Top Layer w5: R1.2 R2.1 R2.1@2755.16,2548.28
NetR3_1: R3.1 U2.A5 | length 422
  Top Layer w5: v1(5075,3030) 5114.49,2990.51 U2.A5 ; v1(5315,2950) R3.1
  Int3 (Sign) w5: v1(5075,3030) 5091.67,3030 5128.44,2993.23 5247.99,2993.23 5271.77,2993.23 v1(5315,2950)
NetR4_2: R4.2 R5.1 U3.2 | length 103.1
  Top Layer w5: R4.2 R5.1 R5.1@2755.16,2763.28
NetR7_2: R7.2 R8.1 | length 158.2
  Top Layer w20: R8.1 R7.2
NetR9_2: R9.2 R10.1 | length 158.2
  Top Layer w20: R10.1 R9.2
NetR11_2: R11.2 R12.1 | length 158.2
  Top Layer w20: R12.1 R11.2
NetR13_2: R13.2 R14.1 | length 158.2
  Top Layer w20: R14.1 R13.2
NetR15_2: R15.2 R16.1 | length 158.2
  Top Layer w20: R16.1 R15.2
NetR17_2: R17.2 R18.1 | length 158.2
  Top Layer w20: R18.1 R17.2
NetR19_2: R19.2 R20.1 | length 158.2
  Top Layer w20: R20.1 R19.2
NetR21_2: R21.2 R22.1 | length 158.2
  Top Layer w20: R22.1 R21.2
OUT+: R10.2 U2.A3 U2.B3 | length 1025.7
  Top Layer w5: v1(5030,3030) 5032.49,3027.51 5032.49,2976.57 5051.5,2957.56 U2.A3 5051.5,2922.29 U2.B3@5052.38,2921.4 ; v1(5740,3350) 5804.29,3350 R10.2
  Int3 (Sign) w5: v1(5030,3030) 5350,3350 v1(5740,3350)
OUT-: R18.2 U2.F3 U2.G3 | length 28.6
  Top Layer w5: U2.F3 5051.5,2766.61 U2.G3@5051.64,2766.47
P1P8V: R4.1 U2.A2 U3.1 U3.10 | length 0.7
  Top Layer w5: U3.10 U3.10@3051.89,2694.53
P5P5V: C6.2 R1.1 U2.E4 U2.F4 U2.G4 U2.G5 U3.5 U3.6 U5.2 | length 213.2
  Top Layer w5: C6.2 4981.83,3400 U5.2 ; U2.G4@5082.77,2770.68 5082.99,2770.9 U2.F4 U2.E4 ; U2.G4 U2.G5
P15V: C1.1 J2.15 U3.7 U3.8 U3.9 | length 239.5
  Top Layer w5: U3.7 3106.97,2635 3125,2653.03 C1.1 ; U3.8 3124.68,2654.68 C1.1 ; U3.9 3107.6,2674.37 3125,2656.97 C1.1
R1K1+: R22.2 U2.E1 U2.E2 | length 31.5
  Top Layer w5: U2.E1 U2.E2
R1K1-: R14.2 U2.C1 U2.C2 | length 31.5
  Top Layer w5: U2.C1 U2.C2
R1K+: R20.2 U2.F1 U2.F2 | length 31.5
  Top Layer w5: U2.F1 U2.F2
R1K-: R12.2 U2.B1 U2.B2 | length 31.5
  Top Layer w5: U2.B1 U2.B2
VREF_5V: C5.2 U1.3 U2.A6 U4.3 U5.6 U5.7 | length 762.7
  Top Layer w5: v1(5115,3030) 5145.98,2999.02 U2.A6 ; v1(5290,3350) 5176.62,3350 U5.6 U5.7 5289.61,3400.39 C5.2 C5.2@5290,3398.03
  Bottom Layer w5: v1(5115,3030) 5290,3205 v1(5290,3350)
pads on no net: J1.1 J1.3 J1.6 J1.7 J1.9 J1.12 J1.13 J1.15 J1.18 J1.19 J1.21 J1.24 J1.25 J1.27 J1.30 J1.31 J1.33 J1.36 J1.37 J1.39 J1.42 J1.43 J1.45 J1.48 J1.49 J1.51 J1.54 J1.55 J1.57 J1.60 J2.01 J2.02 J2.17 J2.18 J2.19 J2.20 U2.C5 U2.D3 U2.D4 U2.D5 U2.F5 U2.F6 U5.5 U5.8

## Polygon pours and split planes (outlines as drawn)
no net on Int1 (GND) (split plane): 6979.9,1020.1 1020.1,1020.1 1020.1,4979.9 6979.9,4979.9
no net on Int4 (PWR) (split plane): 6979.9,1020.1 1020.1,1020.1 1020.1,4979.9 6979.9,4979.9

## Text inside footprints (layer, text, board x,y; h text height)
J1: Top Overlay "63" at 2507.17,1994.13 h40; Top Overlay "64" at 2507.17,2096.5 h40; Top Overlay "1" at 5782.36,1994.13 h40; Top Overlay "2" at 5782.36,2096.5 h40
U2: Top Overlay "A" at 4892.99,2927.48 h50; Top Overlay "G" at 4892.99,2738.5 h50; Top Overlay "1" at 5013.5,3022.99 h50 r90; Top Overlay "7" at 5202.48,3022.99 h50 r90; Mechanical 13 "A" at 4892.99,2927.48 h50; Mechanical 13 "G" at 4892.99,2738.5 h50; Mechanical 13 "1" at 5013.5,3022.99 h50 r90; Mechanical 13 "7" at 5202.48,3022.99 h50 r90; Bottom Overlay "A" at 4917.99,2927.48 h50; Bottom Overlay "G" at 4917.99,2738.5 h50; Bottom Overlay "1" at 4963.5,3022.99 h50 r270; Bottom Overlay "7" at 5152.48,3022.99 h50 r270
U5: Top Overlay "*" at 4959.72,3466.39 h50; Mechanical 13 "*" at 5003.22,3420.89 h50